# EAGLE board MiniBee (EAGLE 5.07)
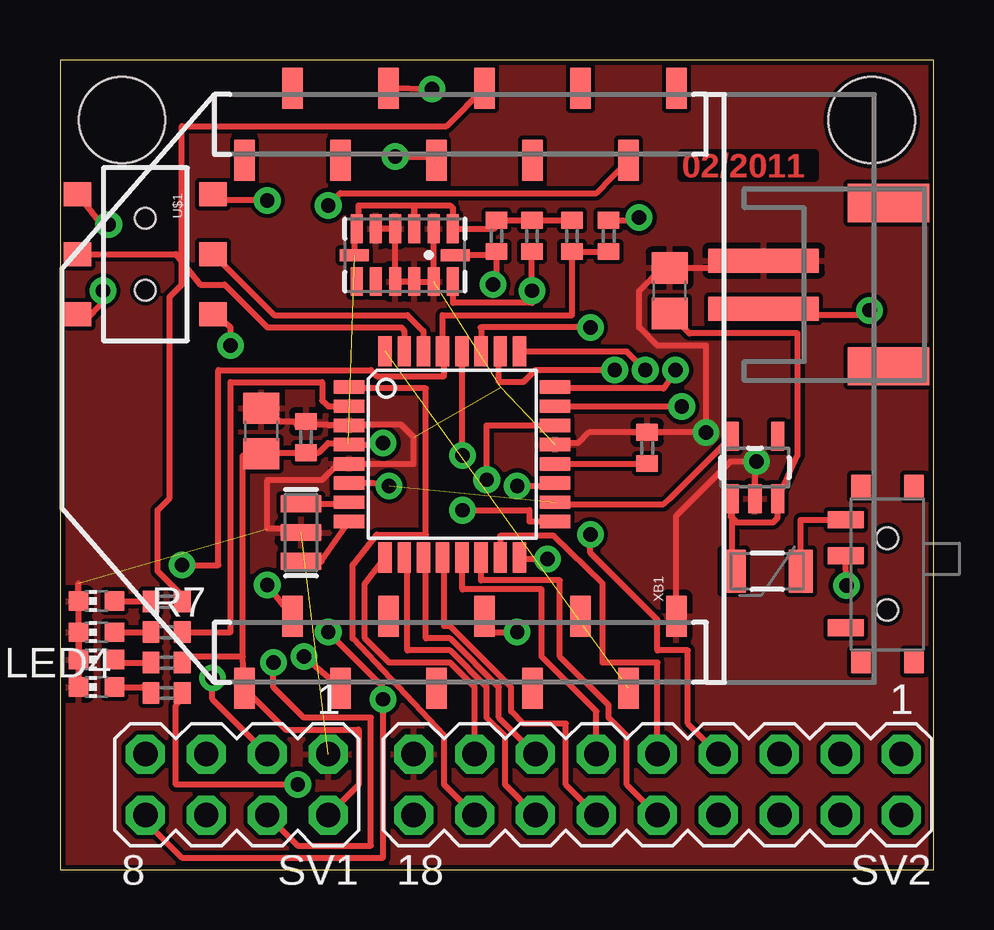
[diagram p0: board, top side]
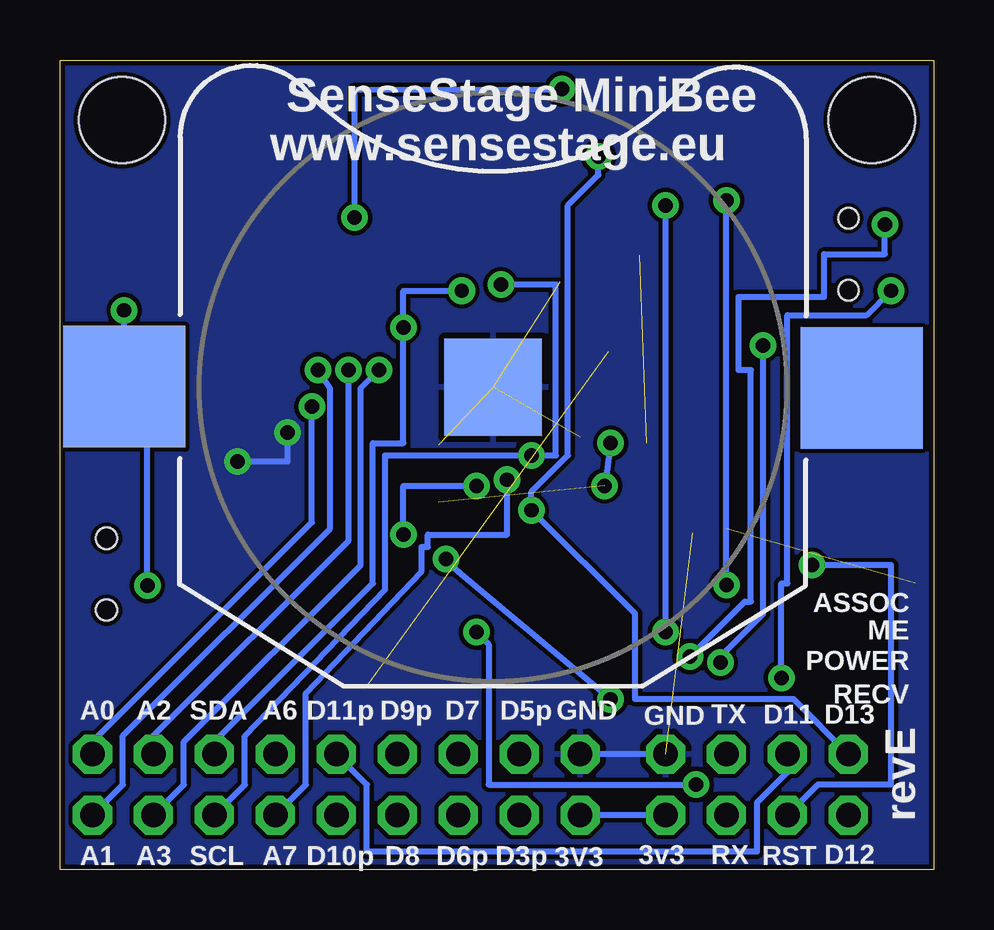
[diagram p1: board, bottom side, seen from below]

Size 36.41 x 33.75 mm. Coordinates in mm from the lower left corner, seen from the top.
Outline: 0,0 36.41,0 36.41,33.75 0,33.75 0,0
Copper layers (1*16): Top 0.035mm / dielectric 1.5mm / Bottom 0.035mm
Design rules "APC": minimum track width 7mil, minimum drill 20mil, track to track 7mil, track to pad 7mil, pad to pad 7mil, via to via 7mil, smd to smd 0mil, copper to edge 8mil, drill to drill 8mil, minimum pad ring 12mil, minimum via ring 10mil, stop-mask expansion 4mil, vias tented up to drill 25mil, thermal gap 10mil
Holes 3.6 mm at 2.58,31.24 33.82,31.24

## Footprints (pad centres in the part's own frame; a part is rotated, then mirrored left to right if it is on the bottom)
C0805 = smd 1.3 x 1.5: 1 -0.95,0; 2 0.95,0
C0402 = smd 0.7 x 0.9: 1 -0.65,0; 2 0.65,0
BATTCON_245MM = smd 5.08 x 5.08: 1 -15.367,0; 3 15.367,0 | smd 4.064 x 4.064: 2 0,0
PTC-1206 = smd 1 x 1.8: 1 -1.4,0; 2 1.4,0
TQFP32-08 = smd 1.27 x 0.559: 1 -4.293,2.8; 2 -4.293,2; 3 -4.293,1.2; 4 -4.293,0.4; 5 -4.293,-0.4; 6 -4.293,-1.2; 7 -4.293,-2; 8 -4.293,-2.8; 17 4.293,-2.8; 18 4.293,-2; 19 4.293,-1.2; 20 4.293,-0.4; 21 4.293,0.4; 22 4.293,1.2; 23 4.293,2; 24 4.293,2.8 | smd 0.559 x 1.27: 9 -2.8,-4.293; 10 -2,-4.293; 11 -1.2,-4.293; 12 -0.4,-4.293; 13 0.4,-4.293; 14 1.2,-4.293; 15 2,-4.293; 16 2.8,-4.293; 25 2.8,4.293; 26 2,4.293; 27 1.2,4.293; 28 0.4,4.293; 29 -0.4,4.293; 30 -1.2,4.293; 31 -2,4.293; 32 -2.8,4.293
S2B-PH = smd 1 x 4.6: 1 -1,-3.7; 2 1,-3.7 | smd 1.6 x 3.4: NC1 -3.4,1.5; NC2 3.4,1.5
CHIP-LED0603 = smd 0.8 x 0.8: A 0,-0.75; C 0,0.75
R0402 = smd 0.7 x 0.9: 1 -0.65,0; 2 0.65,0
RESONATOR-SMD = smd 0.7 x 1.7: 1 -1.2,0; 2 0,0; 3 1.2,0
MA04-2 = drill 1.016 octagon: 1 -3.81,-1.27; 2 -3.81,1.27; 3 -1.27,-1.27; 4 -1.27,1.27; 5 1.27,-1.27; 6 1.27,1.27; 7 3.81,-1.27; 8 3.81,1.27
MA09-2 = drill 1.016 octagon: 1 -10.16,-1.27; 2 -10.16,1.27; 3 -7.62,-1.27; 4 -7.62,1.27; 5 -5.08,-1.27; 6 -5.08,1.27; 7 -2.54,-1.27; 8 -2.54,1.27; 9 0,-1.27; 10 0,1.27; 11 2.54,-1.27; 12 2.54,1.27; 13 5.08,-1.27; 14 5.08,1.27; 15 7.62,-1.27; 16 7.62,1.27; 17 10.16,-1.27; 18 10.16,1.27
PCM_SWITCH_RA = smd 0.711 x 1.499: 1 -2.235,1.74; 2 0.762,1.74; 3 2.261,1.74 | smd 0.991 x 0.813: P$1 -3.645,1.105; P$2 -3.645,-1.105; P$4 3.645,-1.105; P$5 3.645,1.105 | hole 0.889: 1.499,0; -1.499,0
LGA14 = smd 0.5 x 1.2: 1 2,1.1; 2 1.2,1.1; 3 0.4,1.1; 4 -0.4,1.1; 5 -1.2,1.1; 6 -2,1.1; 8 -2,-1.1; 9 -1.2,-1.1; 10 -0.4,-1.1; 11 0.4,-1.1; 12 1.2,-1.1; 13 2,-1.1 | smd 1.2 x 0.5: 7 -2.1,0; 14 2.1,0
AYZ0202 = smd 1 x 1.15: 1 -2.5,2.825; 2 0,2.825; 3 2.5,2.825; 4 -2.5,-2.825; 5 0,-2.825; 6 2.5,-2.825 | hole 0.85: 1.5,0; -1.5,0
SOT23-5 = smd 0.55 x 1.2: 1 -0.95,-1.3; 2 0,-1.3; 3 0.95,-1.3; 4 0.95,1.3; 5 -0.95,1.3
XBEE-SMD = smd 1.7 x 0.85: 1 -12.5,20; 2 -9.5,18; 3 -12.5,16; 4 -9.5,14; 5 -12.5,12; 6 -9.5,10; 7 -12.5,8; 8 -9.5,6; 9 -12.5,4; 10 -9.5,2; 11 12.5,2; 12 9.5,4; 13 12.5,6; 14 9.5,8; 15 12.5,10; 16 9.5,12; 17 12.5,14; 18 9.5,16; 19 12.5,18; 20 9.5,20

## Placement (x,y rotation side)
C1  10uF  [C0805]  25.4,24.13 90 top
C2  10uF  [C0805]  8.38,18.29 90 top
C3  0.1uF  [C0402]  22.86,26.42 270 top
C4  0.1uF  [C0402]  24.47,17.58 270 top
C5  0.1uF  [C0402]  10.25,18.03 90 top
COINCELL  COINCELL  [BATTCON_245MM]  18.36,20.11 359.9 bottom
F1  PTCSMD  [PTC-1206]  29.46,12.45 180 top
IC1  MEGA8-AI  [TQFP32-08]  16.34,17.32 0 top
JST_CONNECTOR  JST_CONNECTOR  [S2B-PH]  33.02,24.38 270 top
LED1  green  [CHIP-LED0603]  1.52,8.76 90 top
LED2  red  [CHIP-LED0603]  1.52,7.62 90 top
LED3  yellow  [CHIP-LED0603]  1.52,11.2 90 top
LED4  blue  [CHIP-LED0603]  1.52,9.91 90 top
R1  470 ohm  [R0402]  4.45,8.64 180 top
R2  470 ohm  [R0402]  4.45,7.37 180 top
R3  470 ohm  [R0402]  4.45,11.18 180 top
R4  1k ohm  [R0402]  18.19,26.42 270 top
R5  1k ohm  [R0402]  19.67,26.42 270 top
R6  10k ohm  [R0402]  21.34,26.42 90 top
R7  470 ohm  [R0402]  4.45,9.91 0 top
RESONATOR  12MHz  [RESONATOR-SMD]  10.04,14.06 270 top
SV1  [MA04-2]  7.37,3.56 180 top
SV2  [MA09-2]  24.89,3.56 180 top
SWITCH  SWITCH  [PCM_SWITCH_RA]  34.47,12.32 90 top
U1  ADXL345  [LGA14]  14.37,25.61 0 top
U$1  AYZ0202  [AYZ0202]  3.56,25.65 270 top
VREG  V_REG_LDOSMD  [SOT23-5]  28.96,16.76 0 top
XB1  XBEE-1B3  [XBEE-SMD]  27.69,20.07 90 top

## Library data of the parts
C1-C5 R1-R7 = rcl
COINCELL F1 JST_CONNECTOR RESONATOR U1 U$1 VREG XB1 = SparkFun
IC1 = atmel
LED1-LED4 = led
SV1 SV2 = con-lstb
SWITCH = myShit

## Nets
A0: IC1.23 SV2.1
A1: IC1.24 SV2.2
A2: IC1.25 SV2.3
A3: IC1.26 SV2.4
A6: IC1.19 SV2.7
A7: IC1.22 SV2.8
ASSOC: R3.1 XB1.15
CTS: IC1.16 SV1.8 XB1.12
D3: IC1.1 SV2.16
D4: IC1.2 R7.2
D5: IC1.9 SV2.15
D6: IC1.10 SV2.14
D7: IC1.11 SV2.13
D8: IC1.12 SV2.12
D9: IC1.13 SV2.11
D10: IC1.14 SV2.10
D11: IC1.15 SV1.5 SV2.9
DIO3: C3.1 XB1.17
GND: C1.2 C2.2 C4.1 C5.2 COINCELL.2 IC1.3 IC1.5 IC1.21 JST_CONNECTOR.1 LED1.C LED2.C LED3.C LED4.C RESONATOR.2 SV1.1 SV2.17 U1.2 U1.4 U1.5 U1.10 U1.11 U1.12 VREG.2 XB1.10
N$1: IC1.7 RESONATOR.1
N$2: IC1.8 RESONATOR.3
N$3: LED1.A R1.2
N$4: COINCELL.1 JST_CONNECTOR.2 SWITCH.2
N$6: LED2.A R2.2
N$7: LED3.A R3.2
N$8: F1.1 SWITCH.3
N$9: C4.2 IC1.20
N$10: LED4.A R7.1
PWM0: R2.1 XB1.6
RST: C3.2 IC1.29 R6.1 SV1.6
RTS: IC1.17 SV1.7 XB1.16
RX: IC1.30 U$1.2
RX1: U$1.1 XB1.2
RX2: SV1.4 U$1.3
SCL: IC1.28 R4.2 SV2.6 U1.14
SDA: IC1.27 R5.2 SV2.5 U1.13
SLEEP: IC1.32 XB1.9
TX: IC1.31 U$1.5
TX1: U$1.4 XB1.3
TX2: SV1.3 U$1.6
V_IN: C1.1 F1.2 VREG.1 VREG.3
VCC: C2.1 C5.1 IC1.4 IC1.6 IC1.18 R1.1 R4.1 R5.1 R6.2 SV1.2 SV2.18 U1.1 U1.3 U1.6 U1.7 VREG.5 XB1.1

## Tracks (layer width: path | path; a pad name or v marks a point on that pad's centre or on a via)
A0  (via drill 0.6)
  Top 0.254: v25.91,19.3 20.65,19.3 IC1.23
  Bottom 0.254: SV2.1 35.05,5.33 25.91,14.48 v25.91,19.3
A1  (via drill 0.6)
  Top 0.254: v25.65,20.83 25.15,20.07 20.69,20.07 IC1.24
  Bottom 0.254: SV2.2 33.78,3.56 33.78,5.59 25.15,14.22 25.15,20.07 v25.65,20.83
A2  (via drill 0.6)
  Top 0.254: v24.38,20.83 23.62,21.59 19.16,21.59 IC1.25
  Bottom 0.254: SV2.3 32.51,5.59 24.38,13.72 v24.38,20.83
A3  (via drill 0.6)
  Top 0.254: v23.11,20.83 19.81,20.83 19.3,20.32 18.29,20.32 18.29,21.56 IC1.26
  Bottom 0.254: SV2.4 31.24,3.56 31.24,5.33 23.88,12.7 23.88,20.07 v23.11,20.83
A6  (via drill 0.6)
  Top 0.254: SV2.7 26.16,6.1 26.16,9.14 24.89,9.14 24.89,10.41 22.1,13.21 v22.1,13.97 | v19.05,16 20.52,16 IC1.19
  Bottom 0.254: v22.1,13.97 22.1,16 v19.05,16
A7  (via drill 0.6)
  Top 0.254: v17.78,16.26 17.78,18.52 IC1.22
  Bottom 0.254: SV2.8 26.16,3.56 26.16,7.37 21.34,12.45 21.34,13.46 21.08,13.46 21.08,13.97 17.78,13.97 v17.78,16.26
ASSOC
  Top 0.254: R3.1 5.33,11.18 4.06,12.45 4.06,14.99 4.57,15.49 4.57,23.88 5.08,24.38 5.08,30.99 16.11,30.99 XB1.15
CTS  (via drill 0.6)
  Top 0.254: v20.32,12.95 19.21,12.95 IC1.16 | XB1.12 22.35,28.19 11.68,28.19 v11.18,27.69 | SV1.8 3.56,2.03 5.08,0.51 13.46,0.51 v13.46,7.11 13.46,7.62 v11.18,9.91
  Bottom 0.254: v13.46,7.11 19.81,12.43 20.41,13.03 20.25,13.03 v20.32,12.95 | v11.18,9.91 v11.18,27.69
D3
  Top 0.254: SV2.16 16,3.56 16,5.59 12.19,9.65 12.19,12.7 13.21,13.97 15.24,13.97 15.24,20.07 12.1,20.07 IC1.1
D4
  Top 0.254: 5.08,9.91 R7.2 7.11,9.91 7.11,20.32 10.92,20.32 10.92,19.56 11.19,19.32 IC1.2
D5
  Top 0.254: SV2.15 17.27,7.62 16.26,8.64 13.72,8.64 12.7,9.65 12.7,11.93 IC1.9
D6
  Top 0.254: SV2.14 18.54,3.56 18.54,5.59 17.78,6.35 17.78,7.62 16.26,9.14 14.48,9.14 14.48,12.89 IC1.10
D7
  Top 0.254: SV2.13 18.29,6.35 18.29,7.62 16.26,9.65 15.24,9.65 15.24,12.93 IC1.11
D8
  Top 0.254: SV2.12 21.08,3.56 21.08,6.1 19.3,6.1 18.8,6.6 18.8,7.62 16.26,10.16 16,10.16 16,12.96 IC1.12
D9
  Top 0.254: SV2.11 22.35,6.6 20.07,8.89 20.07,11.68 16.76,11.68 16.76,13 IC1.13
D10
  Top 0.254: SV2.10 23.62,3.56 23.62,5.59 22.86,6.35 22.86,6.86 20.83,8.89 20.83,12.06 17.54,12.06 IC1.14
D11
  Top 0.254: SV2.9 24.89,8.64 22.61,8.64 22.61,11.94 20.57,13.91 18.34,13.91 IC1.15
  Bottom 0.254: SV1.5 6.1,4.06 7.37,2.79 7.37,0.76 23.62,0.76 23.62,3.56 SV2.9
DIO3  (via drill 0.6)
  Top 0.254: C3.1 24.02,27.07 v24.13,27.18 | v15.49,32.54 XB1.17
  Bottom 0.254: v24.13,27.18 24.13,32.51 v15.49,32.54
GND  (via drill 0.6)  (5 unrouted)
  Top 0.254: LED4.C LED1.C LED2.C LED3.C 0.76,10.96 0.76,11.94 | C2.2 9.19,18.68 C5.2 9.86,18.54 11.18,18.54 11.2,18.52 IC1.3 12.07,18.54 14.22,18.54 14.73,18.03 14.73,16.92 IC1.5 11.58,16.92 10.92,16.26 8.64,16.26 8.64,14.22 9.87,14.22 RESONATOR.2 | JST_CONNECTOR.1 29.02,25.08 C1.2 25.08,25.08 24.13,24.13 24.13,22.61 24.89,21.84 26.92,21.84 v26.92,18.23 C4.1 22.04,18.23 21.59,17.78 20.7,17.78 IC1.21 | U1.2 U1.12 U1.11 U1.10 U1.4 U1.5 | VREG.2 28.96,17.02 v29.01,17.02 27.94,17.02 25.69,14.76 XB1.10
  Bottom 0.254: SV1.1 SV2.17 | v26.92,18.23 26.92,17.02 v29.01,17.02
  pour Top: 0,33.75 36.41,33.75 36.41,0 0,0
  pour Bottom: 0,33.75 36.41,33.75 36.41,0 0,0
N$1
  Top 0.254: RESONATOR.1 11.99,15.26 IC1.7
N$2
  Top 0.254: RESONATOR.3 10.89,12.86 IC1.8
N$3
  Top 0.254: LED1.A 2.29,8.89 2.29,8.64 R1.2
N$4  (via drill 0.6)
  Top 0.254: 32.77,11.94 v32.77,11.85 SWITCH.2 | JST_CONNECTOR.2 29.59,23.11 33.53,23.11 v33.73,23.32
  Bottom 0.254: 33.73,20.27 32.77,20.32 v32.77,11.85 | 33.73,20.27 COINCELL.1 | 33.73,20.27 v33.73,23.32
N$6
  Top 0.254: LED2.A 3.41,7.62 R2.2
N$7
  Top 0.254: LED3.A 3.77,11.2 R3.2
N$8
  Top 0.254: SWITCH.3 30.86,14.59 F1.1
N$9
  Top 0.254: IC1.20 22.42,16.92 C4.2
N$10
  Top 0.254: LED4.A R7.1
PWM0  (via drill 0.6)
  Top 0.254: XB1.6 17.78,10.57 17.78,9.91 v19.05,9.91 | v9.91,3.56 4.83,3.56 4.83,6.86 5.09,7.11 R2.1
  Bottom 0.254: v19.05,9.91 18.54,9.4 18.54,3.56 v9.91,3.56
RST  (via drill 0.6)
  Top 0.254: C3.2 R6.1 21.34,23.11 15.94,23.11 IC1.29 16,21.55 16,20.57 13.21,20.57 12.95,20.83 6.6,20.83 6.6,12.7 v5.08,12.7
  Bottom 0.254: SV1.6 4.83,3.56 1.78,3.56 1.78,12.7 v5.08,12.7
RTS  (via drill 0.6)  (1 unrouted)
  Top 0.254: v16.76,14.99 19.56,14.99 19.56,14.52 IC1.17 | v13.97,29.72 15.53,29.72 XB1.16
  Bottom 0.254: SV1.7 5.84,7.11 12.45,7.11 12.45,10.67 v16.76,14.99 16.76,15.75 15.24,17.27 15.24,27.69 13.97,28.96 v13.97,29.72
RX
  Top 0.254: IC1.30 15.14,22.45 14.48,23.11 8.92,23.11 U$1.2
RX1  (via drill 0.6)
  Top 0.254: U$1.1 6.64,27.9 v8.64,27.9 | XB1.2 v8.64,11.87
  Bottom 0.254: v8.64,11.87 v8.64,27.9
RX2  (via drill 0.6)
  Top 0.254: SV1.4 9.91,1.02 12.95,1.02 12.95,6.35 10.16,6.35 8.89,7.62 v8.89,8.64 | v7.11,21.85 7.11,22.61 U$1.3
  Bottom 0.254: v8.89,8.64 9.14,8.64 7.11,10.67 v7.11,21.85
SCL  (via drill 0.6)
  Top 0.254: U1.14 18.09,25.61 R4.2 18.19,24.54 v18.03,24.38 | v16.76,17.27 16.76,21.59 IC1.28
  Bottom 0.254: v18.03,24.38 15.75,24.38 15.75,17.27 v16.76,17.27 22.86,17.27 22.86,11.68 28.7,5.59 28.7,3.56 SV2.6
SDA  (via drill 0.6)
  Top 0.254: R5.2 v19.67,24.13 19.67,23.62 16.38,23.62 U1.13 | IC1.27 17.54,22.59 17.53,22.61 v22.1,22.61
  Bottom 0.254: v19.67,24.13 22.1,24.13 v22.1,22.61 22.1,17.78 23.37,17.78 23.37,11.94 29.97,5.33 SV2.5
SLEEP  (1 unrouted)
TX
  Top 0.254: IC1.31 14.34,22.47 14.22,22.61 8.64,22.61 6.86,24.38 5.84,24.38 4.83,25.65 U$1.5
TX1  (via drill 0.6)
  Top 0.254: U$1.4 1.75,26.87 v2.03,26.88 | v10.16,8.89 11.68,7.62 11.68,8.13 XB1.3
  Bottom 0.254: v2.03,26.88 2.03,25.65 4.57,25.65 4.57,23.88 8.13,23.88 8.13,20.83 7.62,20.83 7.62,11.18 7.87,11.18 v10.16,8.89
TX2  (via drill 0.6)
  Top 0.254: SV1.3 6.35,7.11 v6.35,8 | v1.79,24.13 1.79,23.62 1.02,22.86 U$1.6
  Bottom 0.254: v6.35,8 6.35,11.94 6.1,11.94 6.1,23.11 2.79,23.11 v1.79,24.13
V_IN
  Top 0.254: C1.1 26.23,22.35 30.73,22.35 30.73,17.27 30.7,17.24 VREG.3 29.91,14.67 29.72,14.48 28.19,14.48 27.94,14.73 27.94,15.4 VREG.1 28.01,12.5 F1.2
VCC  (via drill 0.6)  (2 unrouted)
  Top 0.254: IC1.18 20.71,15.24 25.15,15.24 25.4,15.46 VREG.5 | R6.2 R5.1 R4.1 18.09,26.71 U1.1 16.37,27.58 16.26,27.69 14.73,27.69 | U1.7 12.27,26.61 U1.6 12.45,26.8 12.45,27.69 14.73,27.69 | 14.73,27.69 14.77,27.65 U1.3 14.73,26.75 14.73,27.69 | R1.1 5.35,8.89 7.62,8.89 | 7.62,8.89 7.62,17.27 7.94,17.34 C2.1 8.68,17.38 C5.1 10.78,17.38 11.18,17.78 11.99,17.78 IC1.4 13.4,17.72 v13.46,17.78 | IC1.6 13.07,16.12 v13.72,16 | 7.62,8.89 XB1.1 7.93,7.31 9.4,5.84 12.45,5.84 12.45,3.56 SV1.2
  Bottom 0.254: SV1.2 SV2.18 | v13.46,17.78 v13.72,16

## Text on the board
Top: 02/2011
_bsilk: SenseStage MiniBee | www.sensestage.eu | ASSOC | ME | POWER | RECV | D13 | D11 | TX | GND | GND | D5p | D7 | D9p | D11p | A6 | SDA | A2 | A0 | revE | D12 | RST | RX | 3v3 | 3V3 | D3p | D6p | D8 | D10p | A7 | SCL | A3 | A1